# Altium PCB PCBAdamV2.PcbDoc (part 1 of 2)
Units mm, origin at the board's own origin, x right, y up, seen from the top; angles counter-clockwise.
Board outline 100 x 110 mm, 2 copper layers (Top Layer, Bottom Layer); 253 components, 163 nets, 741 pads, 187 vias.
Unrouted connection lines stored in the file: 7.
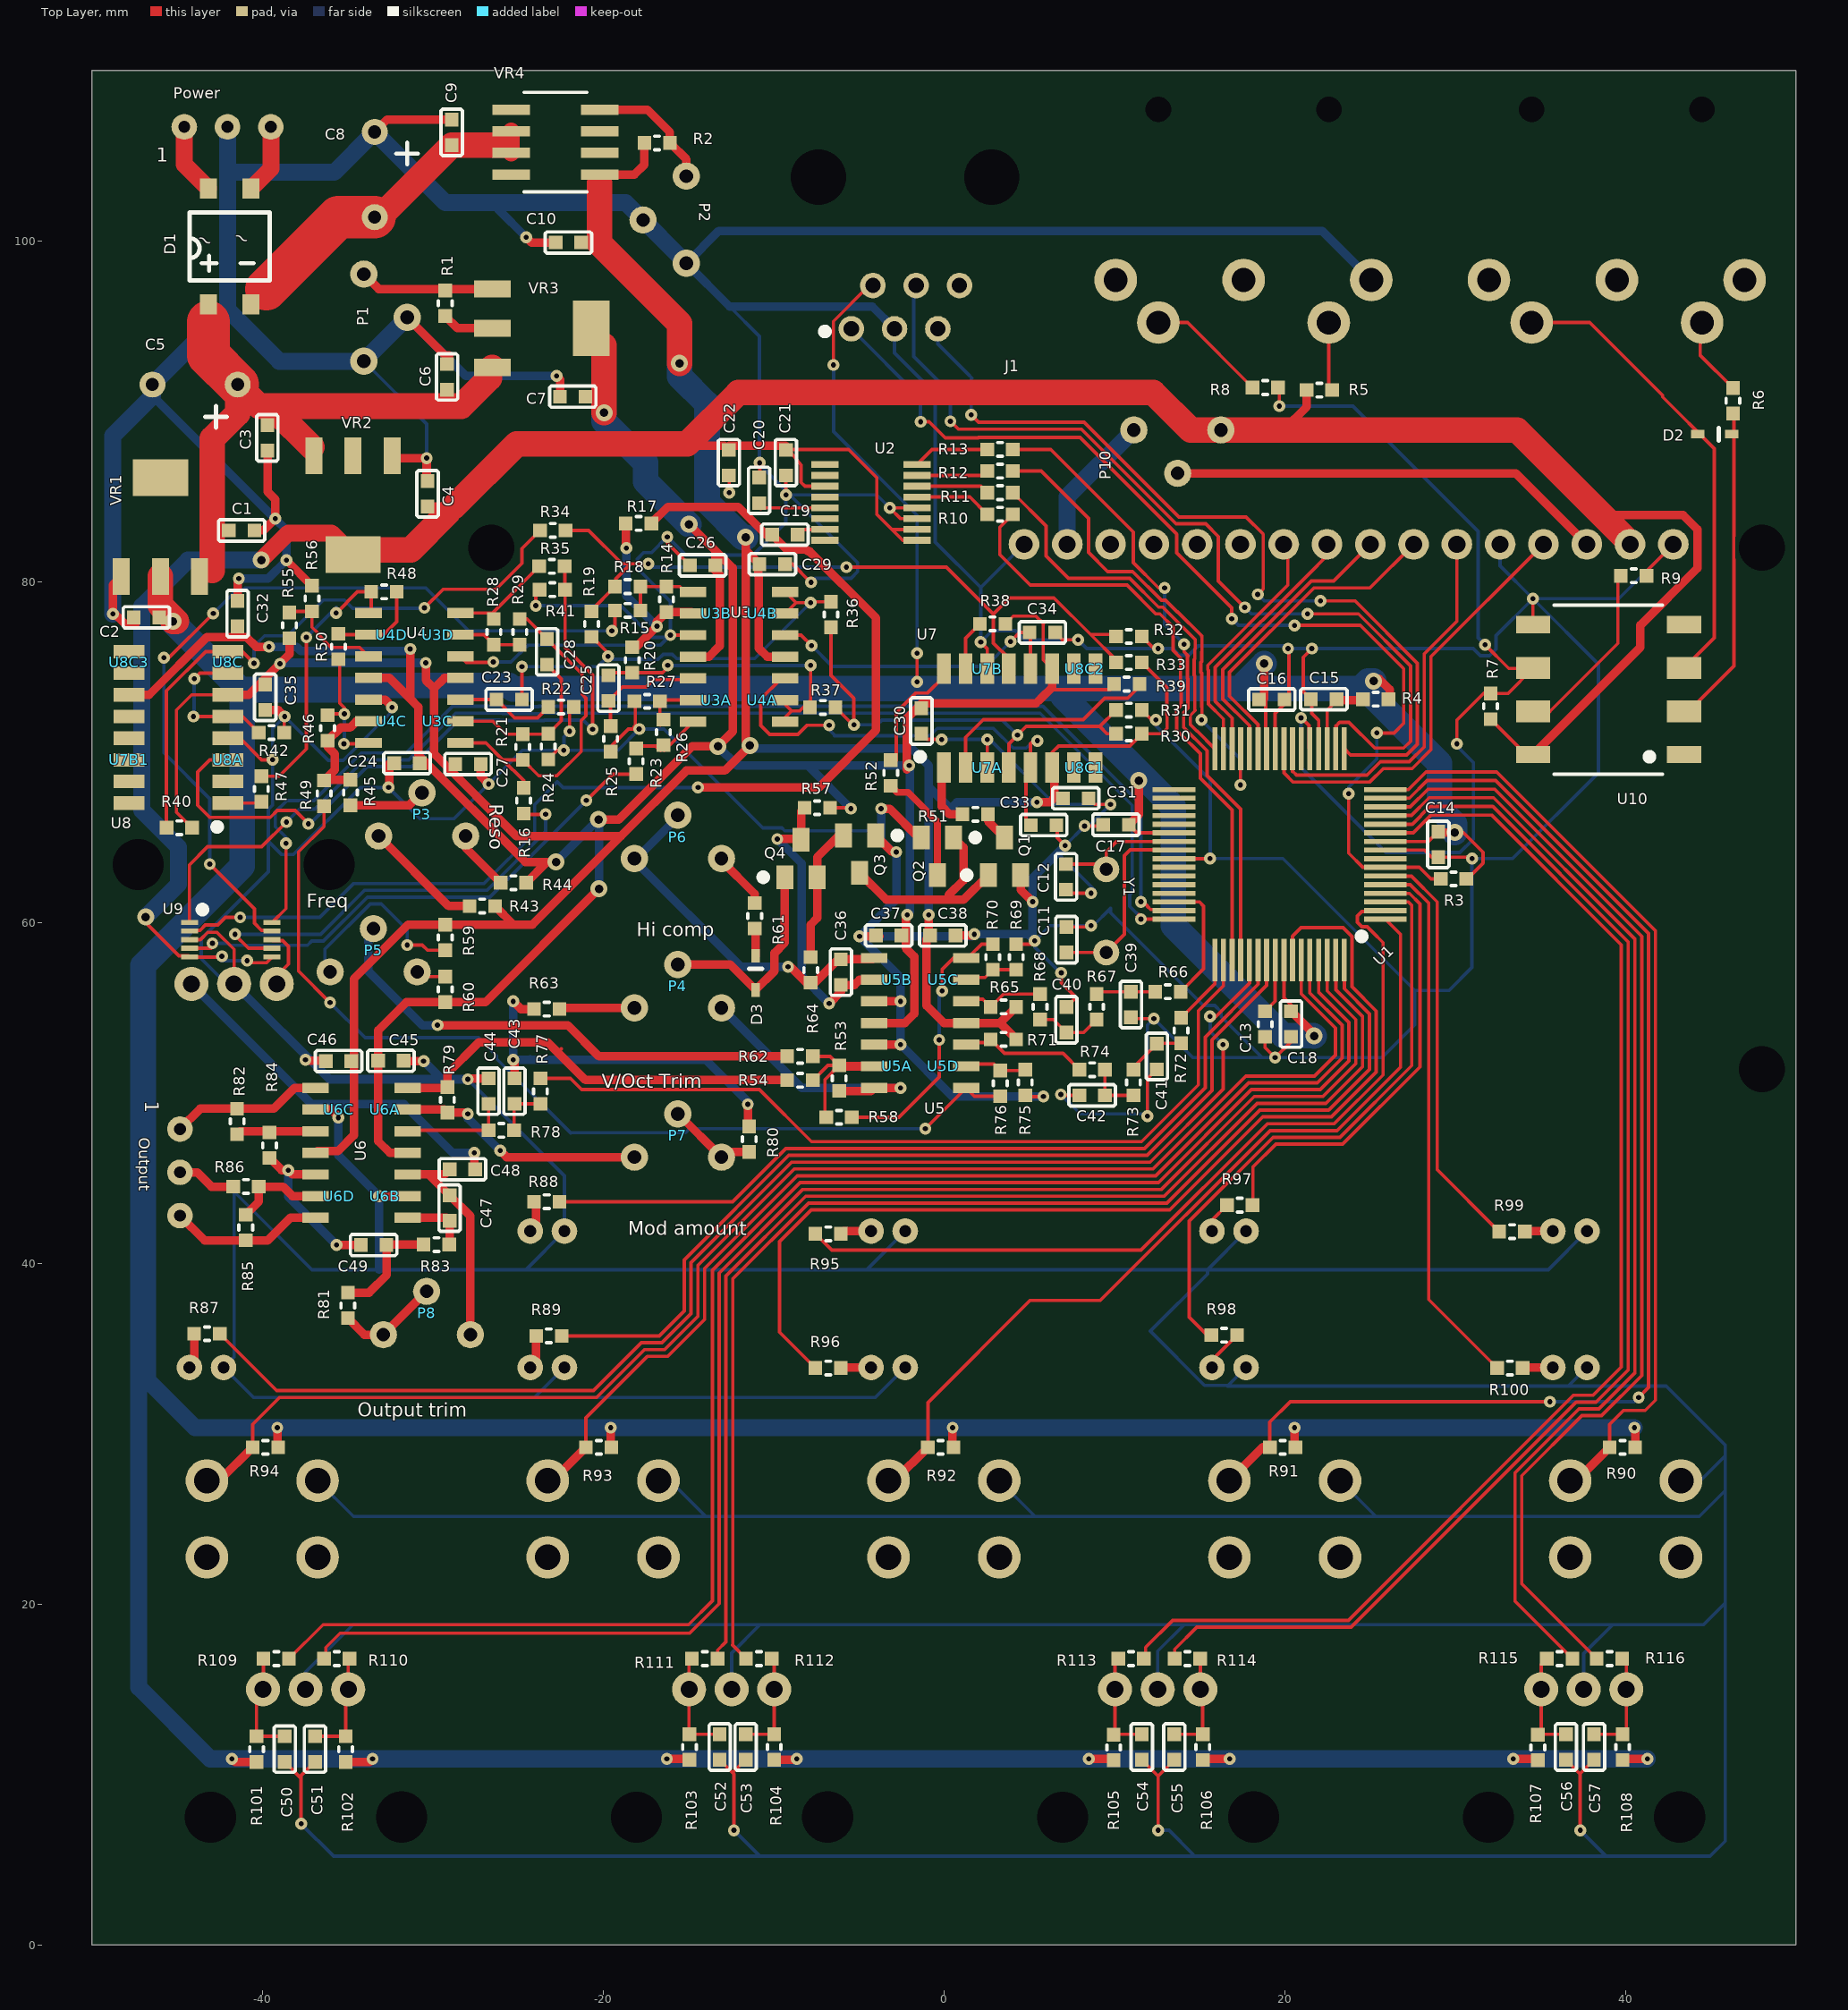
[diagram p0: Top Layer view]
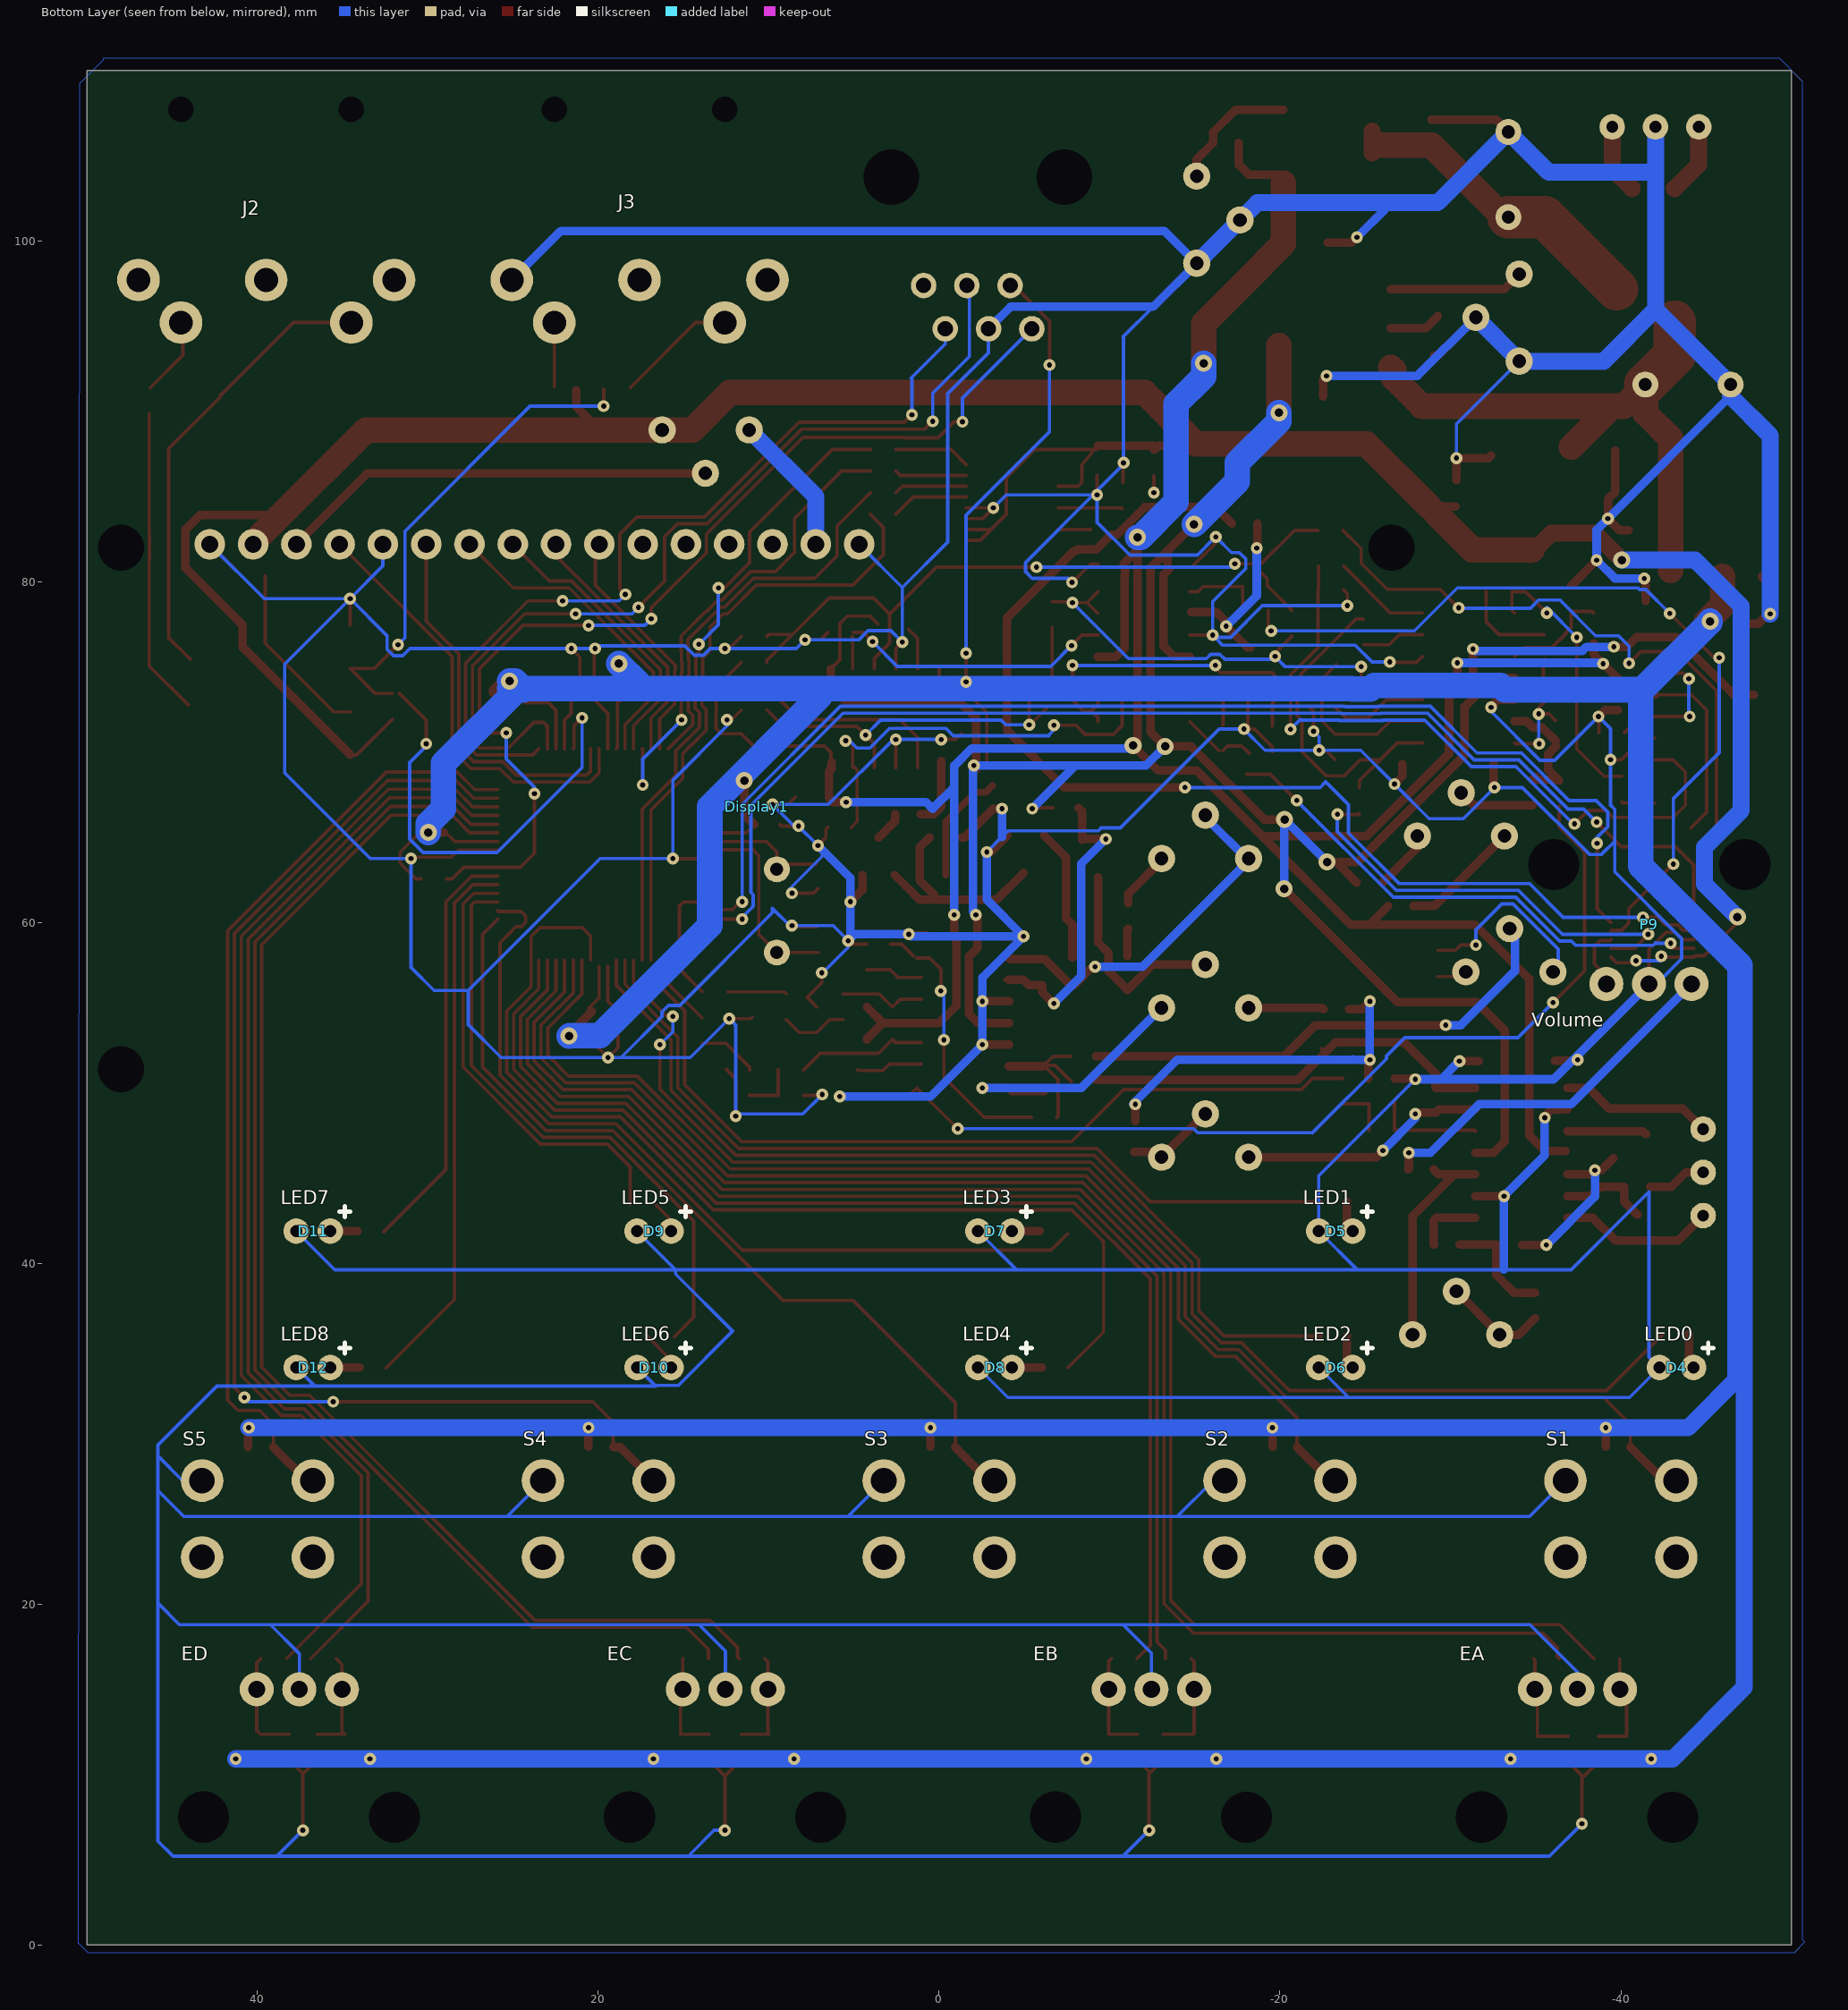
[diagram p1: Bottom Layer view, seen from below]

## Layer stack, top to bottom
Top Solder: solder mask 0.0102, Solder Resist, Dk 3.5
Top Layer: signal copper 0.0356
Dielectric 1: dielectric 0.32, FR-4, Dk 4.8
Bottom Layer: signal copper 0.0356
Bottom Solder: solder mask 0.0102, Solder Resist, Dk 3.5

## Board outline
-50,0 50,0 50,110 -50,110

## Design rules (kind name [scope] priority, off if disabled: settings)
Clearance Clearance_1 [All] p1: gap=0.2
Clearance [All] p2: gap=0.1
ComponentClearance [All] p1: gap=0.01 collisioncheckmode=3 verticalgap=0.01 showdistances=TRUE
MinimumSolderMaskSliver [All] p1: minsoldermaskwidth=0.05
PolygonConnect [All] p1: connectstyle=Relief reliefconductorwidth=0.254 reliefentries=4 polygonreliefangle="90 Angle" airgapwidth=0.254
RoutingVias [All] p1: holewidth=0.711 width=1.27 viastyle="Through Hole" minholewidth=0.711 minwidth=1.27 maxholewidth=0.711 maxwidth=1.27
SilkToSilkClearance [All] p1: silktosilkclearance=0.05
SilkToSolderMaskClearance [IsPad] p1: minsilkscreentomaskgap=0.05 clearancetoexposedcopper=TRUE
SolderMaskExpansion [All] p1: expansion=0.102
UnpouredPolygon [All] p1: allowunpoured=FALSE
Width [All] p1: maxlimit=5 minlimit=0.2 preferedwidth=0.2
25 further rules are at their usual default settings.

## Classes and differential pairs
component class PIC: C11 C12 C13 C14 C15 C16 C17 C18 J1 R3 R4 U1 Y1
component class Multiplexeur: C47 C48 C49 Output P8 P9 R81 R82 R83 R84 R85 R86 U6B U6C U6D U9
component class "MIDI IN": D2 J2 J3 R5 R6 R7 R8 R9 U10
component class Filtres: C23 C24 C25 C26 C27 C28 C29 C30 C31 C32 C33 C34 C35 C36 C37 C38 D3 P3 P4 P5 P6 Q1 Q2 Q3 Q4 R14 R15 R16 R17 R18 R19 R20 R21 R22 R23 R24 R25 R26 R27 R28 R29 R30 R31 R32 R33 R34 R35 R36 R37 R38 R39 R40 R41 R42 R43 R44 R45 R46 R47 R48 R49 R50 R51 R52 R53 R54 R55 R56 R57 R58 R59 R60 R61 R62 R63 R64 U3 U3A U3B U3C U3D U4 U4A U4B U4C U4D U5 U5A U5B U7 U7A U7B U8 U8A U8C
component class Encodeurs: C50 C51 C52 C53 C54 C55 C56 C57 EA EB EC ED R101 R102 R103 R104 R105 R106 R107 R108 R109 R110 R111 R112 R113 R114 R115 R116
component class Display: D4 D5 D6 D7 D8 D9 D10 D11 D12 Display1 P10 R87 R88 R89 R90 R91 R92 R93 R94 R95 R96 R97 R98 R99 R100 S1 S2 S3 S4 S5
component class DAC: C19 C20 C21 C22 R10 R11 R12 R13 U2
component class "Controle du Filtre": C39 C40 C41 C42 C43 C44 C45 C46 P7 R65 R66 R67 R68 R69 R70 R71 R72 R73 R74 R75 R76 R77 R78 R79 R80 U5C U5D U6 U6A
component class Alimentation: C1 C2 C3 C4 C5 C6 C7 C8 C9 C10 D1 P1 P2 Power R1 R2 VR1 VR2 VR3 VR4

## Components (designator, comment, footprint, x,y, rotation, side; value= is the part's Value field where it differs from the comment)
C1 "10uF" "CAPC1608N - cap" -42.799,82.804 r0 top
C2 "100uF" "CAPC1608N - cap" -45.212,78.105 r180 top
C3 "10uF" "CAPC1608N - cap" -39.903,90.018 r270 top
C4 "100uF" "CAPC1608N - cap" -30.099,83.566 r90 top
C5 "2200uF" "Condo electro 13" -43.942,91.567 r180 top
C6 "10uF" "CAPC1608N - cap" -28.956,90.424 r90 top
C7 "100uF" "CAPC1608N - cap" -20.193,91.059 r180 top
C8 "2200uF" "Condo electro 13" -33.401,103.886 r270 top
C9 "10uF" "CAPC1608N - cap" -29.083,107.95 r270 top
C10 "100uF" "CAPC1608N - cap" -23.622,99.695 r0 top
C11 "20pF" "CAPC1608N - cap" 6.985,60.579 r270 top
C12 "20pF" "CAPC1608N - cap" 7.366,61.087 r90 top
C13 "10uF" CAPC1608N 19.05,52.451 r90 top
C14 "0.1uF" "CAPC1608N - cap" 29.21,62.992 r90 top
C15 "0.1uF" "CAPC1608N - cap" 20.701,72.898 r0 top
C16 "0.1uF" "CAPC1608N - cap" 20.828,73.279 r180 top
C17 "0.1uF" "CAPC1608N - cap" 8.509,65.532 r0 top
C18 "0.1uF" "CAPC1608N - cap" 20.574,52.451 r90 top
C19 "10uF" "CAPC1608N - cap" -7.747,82.956 r180 top
C20 "10uF" "CAPC1608N - cap" -10.643,83.769 r90 top
C21 "10uF" "CAPC1608N - cap" -9.474,88.57 r270 top
C22 "0.1uF" "CAPC1608N - cap" -12.421,85.395 r90 top
C23 "0.1uF" "CAPC1608N - cap" -23.927,73.279 r180 top
C24 "5uF" "CAPC1608N - cap" -29.921,69.545 r180 top
C25 "0.1uF" "CAPC1608N - cap" -19.888,75.336 r270 top
C26 "5uF" "CAPC1608N - cap" -12.573,81.153 r180 top
C27 "5uF" "CAPC1608N - cap" -26.34,69.494 r180 top
C28 "22pF" "CAPC1608N - cap" -23.089,74.295 r90 top
C29 "5uF" "CAPC1608N - cap" -8.484,81.229 r180 top
C30 "5uF" "CAPC1608N - cap" -1.524,73.406 r270 top
C31 "5uF" "CAPC1608N - cap" 9.322,67.488 r180 top
C32 "5uF" "CAPC1608N - cap" -41.25,76.53 r90 top
C33 "220pF" "CAPC1608N - cap" 7.442,65.913 r180 top
C34 "220pF" "CAPC1608N - cap" 7.366,77.216 r180 top
C35 "5uF" "CAPC1608N - cap" -39.624,71.628 r90 top
C36 "100pF" "CAPC1608N - cap" -5.842,55.499 r90 top
C37 "5uF" "CAPC1608N - cap" -1.651,59.436 r180 top
C38 "5uF" "CAPC1608N - cap" 1.524,59.436 r180 top
C39 "10uF" "CAPC1608N - cap" 11.176,53.594 r90 top
C40 "10uF" "CAPC1608N - cap" 6.985,55.88 r270 top
C41 "10uF" "CAPC1608N - cap" 12.7,50.546 r90 top
C42 "10uF" "CAPC1608N - cap" 7.112,49.657 r0 top
C43 "10uF" "CAPC1608N - cap" -25.4,51.689 r270 top
C44 "10uF" "CAPC1608N - cap" -26.924,51.689 r270 top
C45 "5uF" "CAPC1608N - cap" -34.036,51.689 r0 top
C46 "5uF" "CAPC1608N - cap" -37.109,51.664 r0 top
C47 "47pF" "CAPC1608N - cap" -29.21,44.831 r270 top
C48 "4.7uF" "CAPC1608N - cap" -26.67,45.72 r180 top
C49 "4.7uF" "CAPC1608N - cap" -31.877,41.275 r180 top
C50 "Cap" "CAPC1608N - cap" -38.481,9.906 r90 top
C51 "Cap" "CAPC1608N - cap" -36.703,9.906 r90 top
C52 "Cap" "CAPC1608N - cap" -12.954,10.033 r90 top
C53 "Cap" "CAPC1608N - cap" -11.43,10.033 r90 top
C54 "Cap" "CAPC1608N - cap" 11.811,10.033 r90 top
C55 "Cap" "CAPC1608N - cap" 13.716,10.033 r90 top
C56 "Cap" "CAPC1608N - cap" 36.703,10.033 r90 top
C57 "Cap" "CAPC1608N - cap" 38.354,10.033 r90 top
D1 "MB8S" MB8S -41.91,96.266 r0 top
D2 "1N914" 1N914 47.625,89.535 r90 top
D3 "1N914" 1N914 -11.938,59.436 r180 top
D4 "LED0" LED -41,33 r180 bottom
D5 "LED1" LED -21,41 r180 bottom
D6 "LED2" LED -21,33 r180 bottom
D7 "LED3" LED -1,41 r180 bottom
D8 "LED4" LED -1,33 r180 bottom
D9 "LED5" LED 19,41 r180 bottom
D10 "LED6" LED 19,33 r180 bottom
D11 "LED7" LED 39,41 r180 bottom
D12 "LED8" LED 39,33 r180 bottom
Display1 "16x2 LCD" DISPLAY 48,82 r180 bottom
EA "EC12E" EC12E -37.456,15 r0 bottom
EB "EC12E" EC12E -12.456,15 r0 bottom
EC "EC12E" EC12E 12.544,15 r0 bottom
ED "EC12E" EC12E 37.544,15 r0 bottom
J1 "Program/Debug" RJ11 -13.462,91.567 r0 top
J2 "Midi IN" "SOCKET MIDI" 57.906,92.621 r180 bottom
J3 "Midi THRU" "SOCKET MIDI" 36,92.621 r180 bottom
Output "Phonejack3" "Header 3" -44.831,45.339 r270 top (schematic designator J4)
P1 "9V ADJ" "BOURNS Trim pot" -34.036,95.504 r90 top
P2 "-9V ADJ" "BOURNS Trim pot" -15.113,101.219 r270 top
P3 "Reso" "BOURNS Trim pot" -30.632,65.075 r180 top
P4 "V/Oct Trim" "BOURNS Trim pot" -15.621,54.991 r180 top
P5 "Freq" "BOURNS Trim pot" -33.477,57.099 r180 top
P6 "Hi comp" "BOURNS Trim pot" -15.621,63.754 r180 top
P7 "Mod amount" "BOURNS Trim pot" -15.621,46.228 r180 top
P8 "Output trim" "BOURNS Trim pot" -30.353,35.814 r180 top
P9 "Volume" "ALPS Potentiometer" -41.275,62.865 r180 bottom
P10 "1K lin" "BOURNS Trim pot" 13.716,88.9 r0 top
Power "12V AC IN" "Header 3" -42.037,106.68 r0 top
Q1 "2N3906" 2N3906 3.556,63.881 r0 top
Q2 "2N3906" 2N3906 -0.381,63.881 r180 top
Q3 "2N3904" 2N3906 -4.953,64.008 r180 top
Q4 "2N3904" 2N3906 -8.382,63.754 r0 top
R1 "120" CAPC1608N -29.464,97.917 r270 top
R2 "240" CAPC1608N -18.415,105.537 r0 top
R3 "10k" CAPC1608N 28.321,62.357 r0 top
R4 "10" CAPC1608N 23.749,72.898 r0 top
R5 "Res1" CAPC1608N 23.622,91.44 r180 top
R6 "Res1" CAPC1608N 46.101,92.202 r270 top
R7 "330" CAPC1608N 31.877,74.27 r270 top
R8 "Res1" CAPC1608N 17.272,91.186 r0 top
R9 "1k" CAPC1608N 42.062,80.543 r180 top
R10 "100" CAPC1608N 4.877,84.15 r180 top
R11 "100" CAPC1608N 4.877,85.42 r180 top
R12 "100" CAPC1608N 4.877,86.69 r180 top
R13 "100" CAPC1608N 4.877,87.96 r180 top
R14 "300k" CAPC1608N -16.078,77.368 r90 top
R15 "2k" CAPC1608N -16.967,78.511 r180 top
R16 "2k" CAPC1608N -24.867,68.732 r270 top
R17 "200k" CAPC1608N -16.332,83.617 r180 top
R18 "100k" CAPC1608N -16.967,79.908 r180 top
R19 "100k" CAPC1608N -20.879,79.096 r270 top
R20 "49.9k" CAPC1608N -18.491,76.987 r270 top
R21 "150k" CAPC1608N -24.917,71.882 r270 top
R22 "4.7M" CAPC1608N -24.054,72.441 r0 top
R23 "2k" CAPC1608N -18.263,71.044 r270 top
R24 "180k" CAPC1608N -23.419,71.907 r270 top
R25 "4.7M" CAPC1608N -19.761,72.365 r270 top
R26 "150k" CAPC1608N -16.662,72.746 r270 top
R27 "39k" CAPC1608N -15.824,73.177 r180 top
R28 "300k" CAPC1608N -26.213,75.463 r90 top
R29 "49.9k" CAPC1608N -24.689,75.463 r90 top
R30 "39k" CAPC1608N 9.271,70.866 r0 top
R31 "100" CAPC1608N 9.271,72.263 r0 top
R32 "100" CAPC1608N 9.271,76.581 r0 top
R33 "43k" CAPC1608N 9.271,75.057 r0 top
R34 "150k" CAPC1608N -21.361,83.21 r180 top
R35 "30k" CAPC1608N -24.587,80.696 r0 top
R36 "100k" CAPC1608N -6.426,76.479 r90 top
R37 "100k" CAPC1608N -8.696,72.415 r0 top
R38 "20k" CAPC1608N 4.445,77.724 r180 top
R39 "20k" CAPC1608N 9.144,73.787 r0 top
R40 "4.7k" CAPC1608N -43.282,65.761 r180 top
R41 "100" CAPC1608N -21.387,79.731 r180 top
R42 "30k" CAPC1608N -41.046,70.942 r0 top
R43 "50k" CAPC1608N -25.502,61.163 r180 top
R44 "50k" CAPC1608N -26.848,62.128 r0 top
R45 "100k" CAPC1608N -34.62,66.04 r90 top
R46 "120k" CAPC1608N -35.966,69.825 r90 top
R47 "30k" CAPC1608N -39.853,66.243 r90 top
R48 "100k" CAPC1608N -31.267,79.604 r180 top
R49 "100k" CAPC1608N -36.17,65.989 r90 top
R50 "100k" CAPC1608N -35.331,74.6 r90 top
R51 "7.5k" CAPC1608N 3.429,66.548 r180 top
R52 "7.5k" CAPC1608N -2.921,67.183 r90 top
R53 "2k" CAPC1608N -6.35,52.451 r270 top
R54 "100k" CAPC1608N -10.033,50.546 r0 top
R55 "100k" CAPC1608N -38.202,75.844 r90 top
R56 "30k" CAPC1608N -36.881,77.419 r90 top
R57 "1M" CAPC1608N -5.842,66.929 r180 top
R58 "100k" CAPC1608N -4.572,48.768 r180 top
R59 "33k" CAPC1608N -29.464,60.706 r270 top
R60 "33k" CAPC1608N -29.464,57.658 r270 top
R61 "10k" CAPC1608N -11.303,61.976 r270 top
R62 "100k" CAPC1608N -10.033,51.943 r0 top
R63 "475" CAPC1608N -21.717,55.118 r180 top
R64 "10k" CAPC1608N -7.62,55.626 r90 top
R65 "18K" CAPC1608N 5.08,55.245 r180 top
R66 "2k" CAPC1608N 14.732,56.134 r180 top
R67 "2k" CAPC1608N 8.763,56.642 r270 top
R68 "3.3k" CAPC1608N 5.842,53.467 r90 top
R69 "10k" CAPC1608N 4.445,56.388 r90 top
R70 "10k" CAPC1608N 2.667,59.563 r270 top
R71 "18K" CAPC1608N 5.08,53.34 r180 top
R72 "2k" CAPC1608N 13.716,55.245 r270 top
R73 "2k" CAPC1608N 10.922,52.197 r270 top
R74 "3.3k" CAPC1608N 10.287,51.562 r180 top
R75 "10k" CAPC1608N 4.572,52.197 r270 top
R76 "10k" CAPC1608N 3.505,48.971 r90 top
R77 "2k" CAPC1608N -23.876,51.689 r270 top
R78 "2k" CAPC1608N -24.384,48.006 r180 top
R79 "10k" CAPC1608N -29.337,51.181 r270 top
R80 "10k" CAPC1608N -11.227,45.695 r90 top
R81 "50k" CAPC1608N -35.179,39.116 r270 top
R82 "10k" CAPC1608N -41.275,46.736 r90 top
R83 "330" CAPC1608N -31.369,40.894 r0 top
R84 "5k" CAPC1608N -39.37,45.339 r90 top
R85 "10k" CAPC1608N -40.767,40.513 r90 top
R86 "10k" CAPC1608N -39.37,44.704 r180 top
R87 "220" CAPC1608N -41.656,36.068 r180 top
R88 "220" CAPC1608N -21.717,43.815 r180 top
R89 "220" CAPC1608N -21.59,35.941 r180 top
R90 "10K" CAPC1608N 38.227,29 r0 top
R91 "10K" CAPC1608N 18.288,29 r0 top
R92 "10K" CAPC1608N -1.778,29 r0 top
R93 "10K" CAPC1608N -21.844,29 r0 top
R94 "10K" CAPC1608N -41.402,29 r0 top
R95 "220" CAPC1608N -8.382,41.529 r0 top
R96 "220" CAPC1608N -8.382,33.655 r0 top
R97 "220" CAPC1608N 18.948,43.612 r180 top
R98 "220" CAPC1608N 14.859,35.585 r0 top
R99 "220" CAPC1608N 31.75,41.656 r0 top
R100 "220" CAPC1608N 31.623,33.655 r0 top
R101 "10K" CAPC1608N -40.132,9.906 r90 top
R102 "10K" CAPC1608N -35.306,13.081 r270 top
R103 "10K" CAPC1608N -14.732,10.033 r90 top
R104 "10K" CAPC1608N -10.16,13.208 r270 top
R105 "10K" CAPC1608N 10.16,10 r90 top
R106 "10K" CAPC1608N 14.986,13.2 r270 top
R107 "10K" CAPC1608N 35.052,10 r90 top
R108 "10K" CAPC1608N 39.624,13.2 r270 top
R109 "330" CAPC1608N -37.592,17 r180 top
R110 "330" CAPC1608N -37.211,16.6 r0 top
R111 "330" CAPC1608N -12.446,17 r180 top
R112 "330" CAPC1608N -12.446,16.6 r0 top
R113 "330" CAPC1608N 12.573,17 r180 top
R114 "330" CAPC1608N 12.7,16.6 r0 top
R115 "330" CAPC1608N 37.719,17 r180 top
R116 "330" CAPC1608N 37.465,16.6 r0 top
S1 "BUT0" "PUSH BUTTON" -40,25 r180 bottom
S2 "BUT1" "PUSH BUTTON" -20,25 r180 bottom
S3 "BUT2" "PUSH BUTTON" 0,25 r180 bottom
S4 "BUT3" "PUSH BUTTON" 20,25 r180 bottom
S5 "BUT4" "PUSH BUTTON" 40,25 r180 bottom
U1 "PIC32MX575F512H" PIC32 25.4,58.293 r180 top
U2 "PCM1781" PCM1781 -5.588,85.09 r90 top
U3 "TL084" "TL084 - Alim" -12.014,75.59 r270 top
U3A "TL084" "TL084 - 3PADS rev" -12.014,73.05 r270 top
U3B "TL084" "TL084 - 3PADS" -12.014,78.13 r270 top
U3C "TL084" "TL084 - 3PADS" -31.064,71.806 r90 top
U3D "TL084" "TL084 - 3PADS rev" -31.064,76.886 r90 top
U4 "TL084" "TL084 - Alim" -31.064,74.346 r270 top
U4A "TL084" "TL084 - 3PADS" -12.014,73.05 r90 top
U4B "TL084" "TL084 - 3PADS rev" -12.014,78.13 r90 top
U4C "TL084" "TL084 - 3PADS rev" -31.064,71.806 r270 top
U4D "TL084" "TL084 - 3PADS" -31.064,76.886 r270 top
U5 "TL084" "TL084 - Alim" -1.397,54.102 r270 top
U5A "TL084" "TL084 - 3pads rev" -1.397,51.562 r270 top
U5B "TL084" "TL084 - 3pads" -1.397,56.642 r270 top
U5C "TL084" "TL084 - 3pads rev" -1.397,56.642 r90 top
U5D "TL084" "TL084 - 3PADS" -1.397,51.562 r90 top
U6 "TL084" "TL084 - Alim" -34.163,46.482 r90 top
U6A "TL084" "TL084 - 3pads rev" -34.163,49.022 r90 top
U6B "TL084" "TL084 - 3PADS" -34.163,43.942 r90 top
U6C "TL084" "TL084 - 3PADS" -34.163,49.022 r270 top
U6D "TL084" "TL084 - 3PADS REV" -34.163,43.942 r270 top
U7 "LM13700" "LM13700 - Alim" -1.397,69.723 r0 top
U7A "LM13700" "LM13700 - A" -1.397,69.723 r0 top
U7B "LM13700" "LM13700 - B" -1.397,69.723 r0 top
U7B1 "LM13700" "LM13700 - B" -42.647,65.608 r90 top (schematic designator U7B)
U8 "LM13700" "LM13700 - Alim" -42.647,65.608 r90 top
U8A "LM13700" "LM13700 - A" -42.647,65.608 r90 top
U8C "LM13700" "LM13700 - C" -42.647,65.608 r90 top
U8C1 "LM13700" "LM13700 - C" -1.397,69.723 r0 top (schematic designator U8C)
U8C2 "LM13700" "LM13700 - D" -1.397,69.723 r0 top (schematic designator U8C)
U8C3 "LM13700" "LM13700 - D" -42.647,65.608 r90 top (schematic designator U8C)
U9 "ADG704" ADG704 -45.923,61.646 r270 top
U10 "6N139" 6N139 44.958,68.707 r90 top
VR1 "LM1117-3.3" LM1117-SOT -45.974,86.106 r0 top
VR2 "LM1117-5.0" LM1117-SOT -34.671,81.585 r180 top
VR3 "LM1117-ADJ" LM1117-SOT -20.701,94.869 r270 top
VR4 "LM337L" LM337L -25.4,105.156 r90 top
Y1 "12.288 MHz" Xtal 9.525,63.119 r270 top

## Footprints (in the part's own frame and the unit in brackets; to place one, negate y for a bottom-side part, rotate by r counter-clockwise, add the part's x,y. Pads: shape width x height; smd on the part's side, far side on the other; paste and mask are expansions set on the pad)
1N914 [mm] "Diode"
  rect 0.5x0.8 smd: 1(-0.889,3.396) 2(-0.889,1.396)
  silkscreen extent -1.27,2.16 -0.51,2.16
2N3906 [mm]
  rect 1x1.4 smd: 1(0.95,-1.1) 2(-0.95,-1.1) 3(0,1.1)
  silkscreen extent -2.42,-1.3 -2.02,-0.9
6N139 [mil] "Optocoupleur"
  rect 40x78.74 smd: 1(45,60) 4(345,60) 5(345,409.13) 8(45,409.13)
  rect 50x78.74 smd: 2(145,60) 3(245,60) 6(245,409.13) 7(145,409.13)
  silkscreen extent 0,110 390,360
ADG704 [mm] "Multiplexeur"
  rect 0.3x1 smd mask+0.05: 1(1.651,1.651) 2(2.151,1.651) 3(2.659,1.651) 4(3.159,1.651) 5(3.675,1.651) 6(3.675,6.498) 7(3.159,6.498) 8(2.659,6.498) 9(2.151,6.498) 10(1.651,6.498)
  silkscreen extent 0.69,2.21 1.09,2.61
"ALPS Potentiometer" [mm] "Encodeur"
  round 0 hole 3 mask+0: 0(-5.207,0.531) 0(6.005,0.531)
  round 2 hole 1 mask+0: 1(2.877,-6.469) 2(-2.123,-6.469) 3(0.377,-6.469)
"BOURNS Trim pot" [mm]
  round 1.6 hole 0.8: 1(-2.57,0) 2(2.54,0) 3(0,-2.54)
CAPC1608N [mm]
  rect 0.8x0.8 smd: 1(0.838,0.203) 2(2.337,0.203)
  silkscreen extent 1.45,-0.2 1.73,0.6
"CAPC1608N - cap" [mm]
  rect 0.8x0.8 smd: 1(0.838,0.203) 2(2.337,0.203)
  silkscreen extent 0.23,-0.43 2.95,0.82
"Condo electro 13" [mil]
  round 60 hole 30: 1(-98.43,0) 2(98.43,0)
  silkscreen extent -73,50 -23,100
DISPLAY [mm]
  round 0 hole 2.7 mask+0: 0(0,-30.607) 0(0,0) 0(74.549,0)
  round 1.8 hole 1: 1(5.2,0.193) 2(7.74,0.193) 3(10.28,0.193) 4(12.82,0.193) 5(15.36,0.193) 6(17.9,0.193) 7(20.44,0.193) 8(22.98,0.193) 9(25.52,0.193) 10(28.06,0.193) 11(30.6,0.193) 12(33.14,0.193) 13(35.68,0.193) 14(38.22,0.193) 15(40.76,0.193) 16(43.3,0.193)
EC12E [mm] "Encodeur"
  round 0 hole 3 mask+0: 0(-5.584,7.5) 0(5.628,7.493)
  round 2 hole 1 mask+0: 1(2.5,0) 2(-2.5,0) 3(0,0)
"Header 3" [mm]
  round 1.5 hole 0.7: 1(-2.54,0) 2(0,0) 3(2.54,0)
LED [mm]
  round 1.5 hole 0.7: 1(3.27,0.889) 2(1.27,0.889)
  silkscreen extent 3.81,1.71 4.45,2.35
LM337L [mm]
  rect 0.6x2.2 smd mask+0.1: 1(0,0) 1(0,-5.2) 1(1.27,0) 1(1.27,-5.2) 2(2.54,-5.2) 3(-1.27,-5.2) ""(-1.27,0) ""(2.54,0)
  round 0.4 on Top Overlay: ""(-1.524,-3.549)
  silkscreen extent -2.29,-4.44 3.56,-0.75
LM1117-SOT [mm]
  rect 1x2.15 smd: 1(2.3,-5.8) 2(-2.3,-5.8) 3(0,-5.8)
  rect 3.25x2.15 smd: 3(0,0)
"LM13700 - A" [mm]
  rect 0.8x1.8 smd: 1(1.397,-0.635) 2(2.667,-0.635) 3(3.937,-0.635) 4(5.207,-0.635) 5(6.477,-0.635)
  silkscreen extent -0.2,-0.2 0.2,0.2
"LM13700 - Alim" [mm]
  rect 0.8x1.8 smd: 1(7.747,5.165) 2(7.747,-0.635)
  silkscreen extent -0.2,-0.2 0.2,0.2
"LM13700 - B" [mm]
  rect 0.8x1.8 smd: 1(1.397,5.165) 2(2.667,5.165) 3(3.937,5.165) 4(5.207,5.165) 5(6.477,5.165)
  silkscreen extent -0.2,-0.2 0.2,0.2
"LM13700 - C" [mm]
  rect 0.8x1.8 smd: 1(9.017,-0.635) 2(10.287,-0.635)
  silkscreen extent -0.2,-0.2 0.2,0.2
"LM13700 - D" [mm]
  rect 0.8x1.8 smd: 9(10.287,5.165) 10(9.017,5.165)
  silkscreen extent -0.2,-0.2 0.2,0.2
MB8S [mm]
  rect 1x1.2 smd: 1(-1.25,6.8) 2(1.25,6.8) 3(1.25,0) 4(-1.25,0)
  silkscreen extent -2.35,1.4 2.35,5.4
PCM1781 [mm] "DAC"
  rect 0.4x1.6 smd mask+0.05: 1(-2.667,-4.003) 2(-2.032,-4.003) 3(-1.397,-4.003) 4(-0.762,-4.003) 5(-0.127,-4.003) 6(0.508,-4.003) 7(1.143,-4.003) 8(1.778,-4.003) 9(1.778,1.397) 10(1.143,1.397) 11(0.508,1.397) 12(-0.127,1.397) 13(-0.762,1.397) 14(-1.397,1.397) 15(-2.032,1.397) 16(-2.667,1.397)
  round 0.4 on Top Overlay: 1(-2.54,-2.54)
PIC32 [mm] "PIC32MX575F512H"
  rect 2.5x0.3 smd paste+0 mask+0.05: 1(-0.5,-1.905) 2(-0.5,-2.405) 3(-0.5,-2.913) 4(-0.5,-3.413) 5(-0.5,-3.929) 6(-0.5,-4.429) 7(-0.5,-4.945) 8(-0.5,-5.445) 9(-0.5,-5.961) 10(-0.5,-6.461) 11(-0.5,-6.969) 12(-0.5,-7.469) 13(-0.5,-7.985) 14(-0.5,-8.485) 15(-0.5,-9.001) 16(-0.5,-9.501) 33(11.9,-9.501) 34(11.9,-9.001) 35(11.9,-8.485) 36(11.9,-7.985) 37(11.9,-7.469) 38(11.9,-6.969) 39(11.9,-6.461) 40(11.9,-5.961) 41(11.9,-5.445) 42(11.9,-4.945) 43(11.9,-4.429) 44(11.9,-3.929) 45(11.9,-3.413) 46(11.9,-2.913) 47(11.9,-2.405) 48(11.9,-1.905)
  rect 0.3x2.5 smd paste+0 mask+0.05: 17(1.905,-11.9) 18(2.405,-11.9) 19(2.913,-11.9) 20(3.413,-11.9) 21(3.929,-11.9) 22(4.429,-11.9) 23(4.945,-11.9) 24(5.445,-11.9) 25(5.961,-11.9) 26(6.461,-11.9) 27(6.969,-11.9) 28(7.469,-11.9) 29(7.985,-11.9) 30(8.485,-11.9) 31(9.001,-11.9) 32(9.501,-11.9) 49(9.501,0.5) 50(9.001,0.5) 51(8.485,0.5) 52(7.985,0.5) 53(7.469,0.5) 54(6.969,0.5) 55(6.461,0.5) 56(5.961,0.5) 57(5.445,0.5) 58(4.945,0.5) 59(4.429,0.5) 60(3.929,0.5) 61(3.413,0.5) 62(2.913,0.5) 63(2.405,0.5) 64(1.905,0.5)
  silkscreen extent 0.69,-1.09 1.09,-0.69
"PUSH BUTTON" [mm]
  round 2.5 hole 1.5: 1(3.25,2.25) 2(-3.25,2.25) 3(-3.25,-2.25) 4(3.25,-2.25)
RJ11 [mm] "RJ11 Socket"
  round 0 hole 3.25 mask+0: 0(6.11,12.159) 0(16.27,12.159)
  round 1.5 hole 0.9: 1(8.025,3.269) 2(9.295,5.809) 3(10.565,3.269) 4(11.835,5.809) 5(13.105,3.269) 6(14.375,5.809)
  silkscreen extent 6.28,2.91 6.68,3.31
"SOCKET MIDI" [mm] "Midi"
  round 1.4 hole 1.5 mask+0: 0(13.415,15.08) 0(23.415,15.08)
  round 2.5 hole 1.4: 1(18.415,5.08) 2(10.922,5.08) 3(25.922,5.08) 4(13.415,2.58) 5(23.415,2.58)
"TL084 - 3PADS" [mm] "Ampli-op"
  round 0.4 on Mech1: 0(0,0)
  rect 0.6x1.55 smd: 1(-1.27,-2.7) 2(0,-2.7) 3(1.27,-2.7)
"TL084 - 3pads" [mm] "Ampli-op"
  round 0.4 on Mech1: 0(0,0)
  rect 0.6x1.55 smd: 1(-1.27,-2.7) 2(0,-2.7) 3(1.27,-2.7)
"TL084 - 3PADS rev" [mm] "Ampli-op"
  round 0.4 on Mech1: 0(0,0)
  rect 0.6x1.55 smd: 1(1.27,-2.7) 2(0,-2.7) 3(-1.27,-2.7)
"TL084 - 3pads rev" [mm] "Ampli-op"
  round 0.4 on Mech1: 0(0,0)
  rect 0.6x1.55 smd: 1(1.27,-2.7) 2(0,-2.7) 3(-1.27,-2.7)
"TL084 - 3PADS REV" [mm] "Ampli-op"
  round 0.4 on Mech1: 0(0,0)
  rect 0.6x1.55 smd: 1(1.27,-2.7) 2(0,-2.7) 3(-1.27,-2.7)
"TL084 - Alim" [mm] "Ampli-op"
  round 0.4 on Top Overlay: 0(-3.81,-1.27)
  round 0.4 on Mech1: 0(-2.54,0) 0(2.54,0)
  rect 0.6x1.55 smd: 1(0,2.7) 2(0,-2.7)
Xtal [mil]
  round 60 hole 30: 1(0,0) 2(192.13,0)

## Part data
C1 C2 C3 C4 C6 C7 C9 C10: library part Cap2, "Capacitor"
C5 C8 C19 C20 C21: library part "Cap Pol1", "Polarized Capacitor (Radial)"
C11 C12 C14 C15 C16 C17 C18 C22 C23 C24 C25 C26 C27 C28 C29 C30 C31 C32 C33 C34 C35 C36 C37 C38 C39 C40 C41 C42 C43 C44 C45 C46 C47 C48 C49: library part "Cap Semi", "Capacitor (Semiconductor SIM Model)"
C13: library part Cap, "Capacitor"
C50 C51 C52 C53 C54 C55 C56 C57: "Capacitor"
D1: library part Bridge1, "Full Wave Diode Bridge"
D2: library part Diode, "Default Diode"
D3: library part "Diode 1N4001", "1 Amp General Purpose Rectifier"
D4: "Typical INFRARED GaAs LED"
D5 D6 D7 D8 D9 D10 D11 D12: library part LED0, "Typical INFRARED GaAs LED"
Display1: library part Display
J1: library part "Header 6H", "Header, 6-Pin, Right Angle"
J2 J3: library part "Header 5", "DIN 5 Pins"
Output: "Jack Socket, 1/4\" [6.5mm], Thru-Hole, Vertical, 3-Conductor Open Circuit (Non-Normalling)"
P1 P2 P3 P4 P5 P6 P8 P9 P10: library part RPot, "Potentiometer"
P7: library part "Res Adj1", "Variable Resistor"
Power: library part "Header 3", "Header, 3-Pin"
Q1 Q2: "PNP General Purpose Amplifier"
Q3 Q4: "NPN General Purpose Amplifier"
R1 R2 R10 R11 R12 R13 R14 R15 R16 R17 R18 R19 R20 R21 R22 R23 R24 R25 R26 R27 R28 R29 R30 R31 R32 R33 R34 R35 R36 R37 R38 R39 R40 R41 R42 R43 R44 R45 R46 R47 R48 R49 R50 R51 R52 R53 R54 R55 R56 R57 R58 R59 R60 R61 R62 R63 R64 R65 R66 R67 R68 R69 R70 R71 R72 R73 R74 R75 R76 R77 R78 R79 R80 R81 R82 R83 R84 R85 R86: library part Res3, "Resistor"
R3 R4 R7 R9 R87 R88 R89 R90 R91 R92 R93 R94 R95 R96 R97 R98 R99 R100 R101 R102 R103 R104 R105 R106 R107 R108 R109 R110 R111 R112 R113 R114 R115 R116: library part Res1, "Resistor"
R5 R6 R8: "Resistor"
S1 S2 S3 S4 S5: library part SW-PB, "Switch"
U1: library part "PIC32 MX575F512H"
U2: library part "PCM1781 DAC"
U3 U4 U5 U6: library part TL_CLEAN
U7A U7B U7B1 U8A: library part LM13700_2
U8C U8C1 U8C2 U8C3: library part LM13700_1
U10: library part Optocoupleur
VR1 VR2 VR3 VR4: library part "Volt Reg", "Voltage Regulator"
Y1: library part XTAL, "Crystal Oscillator"

## Via types
v1: diameter 0.7, hole 0.3, Top Layer to Bottom Layer, 170 vias
v2: diameter 1, hole 0.5, Top Layer to Bottom Layer, 17 vias

## Nets (pads, with @x,y where several pads share a name; then routed paths per layer and width w, separated by ;. In a path a pad name is that pad's centre, name@x,y a point inside that pad or via, vN(x,y) a via of type N, cw(c..) or ccw(c..) an arc to the next point about the centre after c; other vN are vias at no path point)
+3,3V: C2.1 C14.2 C15.2 C16.2 C17.2 C18.2 J1.2 R3.2 R4.1 R4.2 R90.2 R91.2 R92.2 R93.2 R94.2 R101.1 R102.2 R103.1 R104.2 R105.1 R106.2 R107.1 R108.2 U1.10 U1.19 U1.26 U1.38 U1.57 VR1.3 | length 430.1
  Top Layer w0.2: v1(-6.477,92.71) -6.487,92.72 -6.487,95.271 -4.382,97.376 J1.2@-4.167,97.376 ; v1(-1.575,74.117) v1(-1.575,75.794) ; C17.2@10.846,65.735 11.319,65.262 U1.38@13.5,65.262 ; C16.2@18.796,73.127 18.745,73.076 18.881,72.94 18.881,70.251 U1.26@18.939,70.193 ; U1.57@19.955,57.412 19.955,55.585 C18.2@20.561,54.978 ; U1.19@22.487,70.193 22.487,72.449 C15.2@23.089,73.05 ; U1.10@25.9,64.754 28.432,64.754 C14.2@29.007,65.329 ; v2(29.972,65.278) 30.48,65.278 31.638,64.12 31.638,63.485 30.713,62.56 R3.2@30.404,62.56
  Top Layer w0.5: v1(-41.783,10.922) -41.605,10.744 R101.1@-40.335,10.744 ; R94.2@-39.116,29.254 v1(-39.116,30.353) ; R102.2@-35.103,10.744 -33.706,10.744 v1(-33.528,10.922) ; R93.2@-19.558,29.254 v1(-19.558,30.353) ; v1(-16.256,10.922) -14.986,10.922 R103.1@-14.935,10.871 ; R104.2@-9.957,10.871 v1@-8.687,10.871 ; R92.2@0.508,29.254 v1(0.508,30.353) ; v1(8.509,10.922) R105.1@9.873,10.922 ; C17.2@10.846,65.735 11.43,66.319 v2(11.43,68.326) ; R106.2@15.248,10.922 v1(16.764,10.922) ; C16.2@18.796,73.127 v2(18.796,75.184) ; C18.2@20.371,54.788 v2@21.717,53.442 ; R91.2@20.574,29.254 v1(20.574,30.353) ; C15.2@23.089,73.05 R4.1@24.257,73.05 ; v2(25.21,74.168) 25.4,74.168 25.527,74.295 26.162,73.66 R4.2@26.162,73.457 ; C14.2@29.058,65.278 v2(29.972,65.278) ; v1(33.401,10.922) R107.1@34.765,10.922 ; R108.2@39.886,10.922 v1(41.275,10.922) ; v1(40.513,30.353) 40.564,30.302 R90.2@40.564,29.203
  Top Layer w1.5: VR1.3@-45.974,80.306 -45.974,78.613 -45.034,77.673 v2(-45.237,77.673)
  Bottom Layer w0.2: v1(-6.477,92.71) -6.477,88.798 -1.575,83.896 v1(-1.575,75.794) v1@-1.575,75.768
  Bottom Layer w1: v1(40.513,30.353) v1(20.574,30.353) v1(0.508,30.353) v1(-19.558,30.353) v1(-39.116,30.353) -43.942,30.353 -47.244,33.655 -47.244,15.113 -43.053,10.922 v1(-41.783,10.922) v1(-33.528,10.922) v1(-16.256,10.922) v1(-8.636,10.922) v1(8.509,10.922) v1(16.764,10.922) v1(33.401,10.922) v1(41.275,10.922)
  Bottom Layer w1.5: -46.99,33.401 -46.99,57.48 -41.173,63.297 -41.173,73.558 -45.237,77.622 v2(-45.237,77.673) ; -41.275,73.66 -33.182,73.66 -32.923,73.919 -25.516,73.919 -25.303,73.706 -24.227,73.706 -24.201,73.732 v2@25.21,73.732 ; 6.985,73.279 13.462,66.802 13.462,59.817 19.909,53.37 21.687,53.37 v2(21.717,53.34) ; 17.653,74.041 v2(18.796,75.184) ; 24.312,73.732 24.384,73.66 ; v2(25.21,74.168) 24.892,74.168 24.384,73.66 ; v2(29.972,65.278) 29.972,65.786 29.083,66.675 29.083,69.342 24.765,73.66 24.384,73.66
+5V: C4.1 C21.1 C22.2 Display1.2 P10.2 R5.2 R7.2 U2.1@-1.585,82.423 U2.2 U2.11 U9.5 U9.6 U10.8 VR2.3 | length 178.3
  Top Layer w0.2: v2(-46.838,60.325) -46.838,59.978 -44.896,58.037 -44.338,58.037 U9.5@-44.272,57.971 v1@-42.367,57.971 ; v1@-40.742,57.633 -39.763,57.633 U9.6@-39.425,57.971 ; C21.1@-9.296,87.986 -8.382,86.843 -8.382,85.827 -8.153,85.598 U2.11@-6.985,85.598 ; C21.1@-9.246,87.757 -5.588,87.757 -3.937,86.106 -3.937,83.947 -3.048,83.058 ; U2.1@-1.585,82.423 -2.413,82.423 -3.048,83.058 ; U2.2@-1.585,83.058 -3.048,83.058 ; R7.2@32.08,71.933 34.188,69.825 U10.8@34.566,69.825
  Top Layer w0.5: C4.1@-30.302,84.404 -28.753,84.404 ; -14.402,87.986 -12.878,87.986 C22.2@-12.624,87.732 ; C22.2@-12.598,87.986 C21.1@-9.296,87.986 ; 19.939,88.9 21.285,90.246 R5.2@21.285,91.237 ; U10.8@34.566,69.85 40.869,76.153 40.869,77.445 44.221,80.797 44.221,83.058 43.383,83.896 38.633,83.896
  Top Layer w1: v2@-40.017,81.305 -38.467,82.855 -35.941,82.855 VR2.3@-34.671,81.585
  Top Layer w1.5: VR2.3@-34.798,81.864 -31.293,81.864 -29.146,84.011 ; -28.753,84.404 -25.07,88.087 -15.062,88.087 -12.06,91.089 12.289,91.089 14.478,88.9 19.939,88.9 33.629,88.9 38.633,83.896 40.26,82.269 Display1.2@40.26,82.193
  Bottom Layer w0.2: v1(-42.367,58.014) -42.57,58.014 -42.367,57.81 -42.367,57.76 v1(-40.894,57.76)
  Bottom Layer w1: v2@-46.736,60.427 -44.907,62.255 -44.907,64.414 -47.066,66.573 -47.066,78.562 -44.362,81.266 v2(-40.056,81.266)
+9V: C7.1 C24.1 C26.1 C30.1 C32.1 C37.1 C45.1 R1.2 R38.1 R39.1 R44.2 R57.1 R60.2 U3.2 U4.2 U5.2 U6.2 U7.1 U8.1 VR3.3 | length 175.6
  Top Layer w0.2: R57.1@-6.68,66.726 -5.512,66.726 v1(-5.461,66.675) ; v1@-2.235,60.376 v1(-2.159,60.452) ; R38.1@3.607,77.521 4.064,77.978 5.393,77.978 5.831,77.54 5.828,77.537 5.828,75.41 U7.1@6.35,74.888 ; 5.4,72.847 5.705,73.152 ; 6.487,73.66 9.779,73.66 R39.1@10.109,73.99
  Top Layer w0.5: U8.1@-47.812,73.355 -46.634,73.355 -43.243,76.746 -43.243,76.745 -40.925,76.745 -40.355,76.175 v1(-39.599,76.175) ; U4.2@-33.764,74.346 -32.537,74.346 -31.318,73.127 ; U6.2@-31.463,46.482 -32.512,46.482 -33.198,47.168 C45.1@-33.198,51.892 -33.198,53.67 -31.547,55.321 R60.2@-29.261,55.321 -26.899,55.321 v2(-20.244,61.976) ; v1(-31.318,76.048) -31.318,73.127 ; R1.2@-29.261,95.58 -28.55,94.869 VR3.3@-26.501,94.869 ; R44.2@-24.511,62.332 -23.292,63.551 ; v2(-22.758,63.551) -23.292,63.551 ; v2(-20.269,66.04) -19.075,66.04 -14.783,70.333 v2(-13.259,70.333) -12.395,71.196 -12.395,80.797 -13.411,81.813 ; v2(-14.961,83.363) -13.411,81.813 ; U3.2@-14.714,75.59 -13.792,75.59 -13.157,76.225 -13.157,80.391 C26.1@-13.487,80.721 ; C26.1@-13.411,80.95 -13.411,81.813 ; U5.2@-4.097,54.102 -2.286,54.102 -1.74,54.648 -1.74,58.001 -2.235,58.496 v1@-2.235,60.376 ; v1@-2.171,68.973 -2.171,71.981 -1.305,72.847 5.4,72.847 ; 5.567,73.014 5.705,73.152 6.35,73.797 U7.1@6.35,74.888 ; -31.318,73.127 -30.836,72.644 -30.836,69.825 -24.561,63.551 -23.292,63.551
  Top Layer w1.5: v2(-19.939,89.916) VR3.3@-19.939,93.853
  Bottom Layer w0.5: v1(-39.599,76.175) -37.987,76.175 -37.746,75.933 -31.432,75.933 v1(-31.318,76.048) ; v2@-22.86,63.449 v2(-22.758,63.551) v2(-20.269,66.04) -20.244,66.015 v2(-20.244,61.976) ; v2(-13.259,70.333) -12.141,69.215 -8.001,69.215 ; v1(-5.461,66.675) -8.001,69.215 ; v1(-2.159,60.452) -1.994,60.617 v1@-1.994,69.215 ; v1(-2.032,69.215) -8.001,69.215
  Bottom Layer w1.5: v2(-19.939,89.916) -19.939,89.408 -17.501,86.97 -17.501,85.877 v2@-14.974,83.35
-9V: C10.2 C27.2 C29.2 C31.2 C35.2 C38.2 C46.2 R2.1 R30.2 R33.2 R40.1 R43.1 R55.1 R59.1 R65.1 R71.1 U3.1 U4.1 U5.1 U6.1 U7.2 U8.2 VR4.3 | length 191
  Top Layer w0.2: R40.1@-44.12,65.557 -45.034,66.472 -45.034,72.466 -44.145,73.355 U8.2@-42.012,73.355 ; U6.1@-36.863,46.482 U6.1@-36.766,46.579 ; C38.2@-0.889,59.309 C38.2@-0.813,59.233 ; U7.2@6.35,69.088 6.35,69.977 6.731,70.358 10.897,70.358 R30.2@11.608,71.069 12.776,71.069 13.096,71.389 13.096,72.166 13.081,72.181 13.081,73.787 R33.2@11.608,75.26
  Top Layer w0.5: U8.2@-42.012,73.355 -40.792,73.355 -38.405,75.743 R55.1@-38.405,76.378 ; U6.1@-36.766,46.579 -35.56,46.579 -34.62,47.519 -34.62,56.693 -31.445,59.868 R59.1@-29.261,59.868 -25.248,59.868 ; v1(-30.404,75.235) -30.404,74.219 -29.921,73.736 ; U4.1@-28.364,74.346 -29.312,74.346 -29.921,73.736 ; R43.1@-26.34,60.96 -25.248,59.868 ; VR4.3@-20.2,103.886 -18.161,103.886 -17.577,104.47 R2.1@-17.577,105.74 ; v2@-11.633,70.637 -11.633,81.839 ; v2(-11.633,82.601) -11.633,81.839 ; v2(-11.379,70.383) -12.852,68.91 -15.113,68.91 -18.948,65.075 ; C29.2@-10.897,80.823 -10.897,80.366 -10.871,80.391 -10.871,76.098 -10.363,75.59 U3.1@-9.314,75.59 ; C29.2@-10.82,81.026 -11.633,81.839 ; C38.2@-0.889,59.309 v1(-0.889,60.452) ; C38.2@-0.813,59.233 -1.016,59.03 -1.016,55.118 0,54.102 U5.1@1.303,54.102 3.302,54.102 ; R71.1@4.242,53.137 4.242,53.162 3.302,54.102 ; R65.1@4.242,55.042 3.302,54.102 ; v1(5.461,67.056) 6.223,67.056 6.477,67.31 6.477,68.859 U7.2@6.299,69.037 ; U7.2@6.299,69.418 U7.2@6.299,69.037 ; U7.2@6.35,69.088 U7.2@6.299,69.037 ; -29.921,73.736 -29.921,69.901 -25.095,65.075 -18.948,65.075 ; -25.248,59.868 -24.155,59.868 -18.948,65.075
  Top Layer w1.5: -20.2,103.378 -20.2,99.829 -17.907,97.536 -15.519,95.148 v2(-15.519,92.812)
  Bottom Layer w0.5: v1@-38.964,75.235 -38.962,75.233 -30.405,75.233 v1(-30.404,75.235) ; v2(-11.379,70.383) -11.214,70.218 -1.904,70.218 -0.889,69.203 -0.889,67.945 ; v1(-0.889,60.452) -0.889,67.945 ; v1(5.461,67.056) 0.762,67.056 0.381,66.675 -0.889,67.945
  Bottom Layer w1.5: v2(-15.519,92.812) -15.519,92.05 -13.898,90.429 -13.898,84.679 -11.821,82.601 v2(-11.633,82.601)
  other v1: -38.964,75.184

## Text inside footprints (layer, text, board x,y; h text height)
D1: Top Overlay "~" at -43.942,99.949 h0.8 r330; Top Overlay "~" at -41.783,100.076 h0.8 r330
Output: Top Overlay "1" at -46.863,49.53 h0.8 r270
Power: Top Overlay "1" at -46.228,104.648 h0.8